# Altium PCB AP1220_MachXO2_DB.PcbDoc (part 2 of 2)
Units mil, origin at the board's own origin, x right, y up, seen from the top; angles counter-clockwise.
Board outline 3005 x 3350 mil, 4 copper layers (Top Layer, GND PLANE, POWER PLANE, Bottom Layer); 120 components, 198 nets, 716 pads, 269 vias.
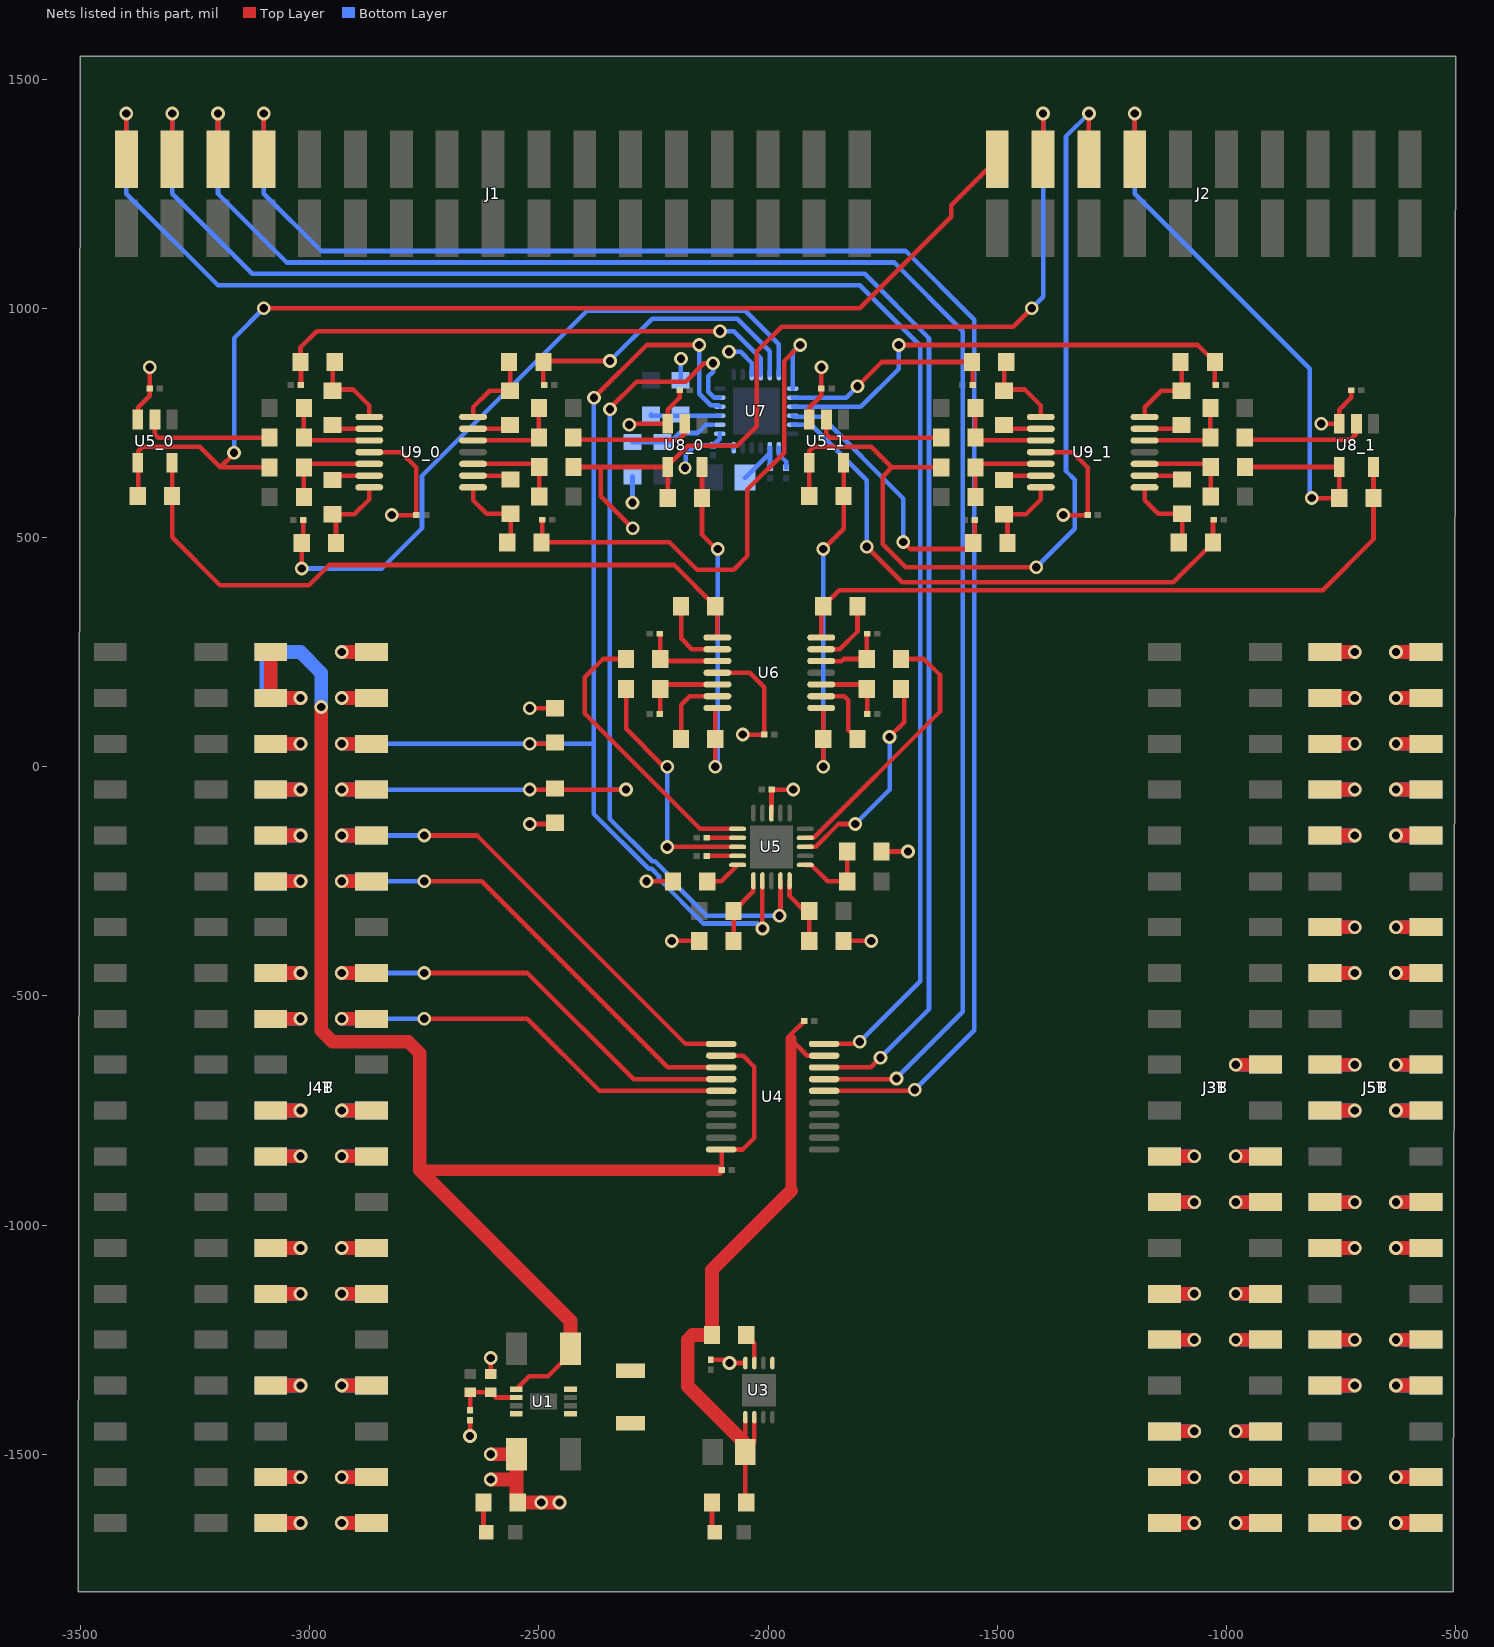
[diagram p4: the nets of this part, all layers, seen from the top]

## Via types
v1: diameter 30, hole 18, Top Layer to Bottom Layer, 251 vias
v2: diameter 25.98, hole 12.99, Top Layer to Bottom Layer, tented top, 11 vias
v3: diameter 30, hole 18, Top Layer to Bottom Layer, tented both sides, 6 vias
v4: diameter 28, hole 18, Top Layer to Bottom Layer, 1 vias

## Nets (pads, with @x,y where several pads share a name; then routed paths per layer and width w, separated by ;. In a path a pad name is that pad's centre, name@x,y a point inside that pad or via, vN(x,y) a via of type N, cw(c..) or ccw(c..) an arc to the next point about the centre after c; other vN are vias at no path point) (continued)
J3-20: J3B.20 J3T.20 | length 130
  Top Layer w30: v1(-980,-650) J3T.20@-915,-650
  Bottom Layer w30: v1(-980,-650) J3B.20@-915,-650
J3-23: J3B.23 J3T.23 | length 130
  Top Layer w30: J3T.23@-1135,-850 v1(-1070,-850)
  Bottom Layer w30: J3B.23@-1135,-850 v1(-1070,-850)
J3-24: J3B.24 J3T.24 | length 130
  Top Layer w30: v1(-980,-850) J3T.24@-915,-850
  Bottom Layer w30: v1(-980,-850) J3B.24@-915,-850
J3-25: J3B.25 J3T.25 | length 130
  Top Layer w30: J3T.25@-1135,-950 v1(-1070,-950)
  Bottom Layer w30: J3B.25@-1135,-950 v1(-1070,-950)
J3-26: J3B.26 J3T.26 | length 130
  Top Layer w30: v1(-980,-950) J3T.26@-915,-950
  Bottom Layer w30: v1(-980,-950) J3B.26@-915,-950
J3-29: J3B.29 J3T.29 | length 130
  Top Layer w30: J3T.29@-1135,-1150 v1(-1070,-1150)
  Bottom Layer w30: J3B.29@-1135,-1150 v1(-1070,-1150)
J3-30: J3B.30 J3T.30 | length 130
  Top Layer w30: v1(-980,-1150) J3T.30@-915,-1150
  Bottom Layer w30: v1(-980,-1150) J3B.30@-915,-1150
J3-31: J3B.31 J3T.31 | length 130
  Top Layer w30: J3T.31@-1135,-1250 v1(-1070,-1250)
  Bottom Layer w30: J3B.31@-1135,-1250 v1(-1070,-1250)
J3-32: J3B.32 J3T.32 | length 130
  Top Layer w30: v1(-980,-1250) J3T.32@-915,-1250
  Bottom Layer w30: v1(-980,-1250) J3B.32@-915,-1250
J3-35: J3B.35 J3T.35 | length 130
  Top Layer w30: J3T.35@-1135,-1450 v1(-1070,-1450)
  Bottom Layer w30: J3B.35@-1135,-1450 v1(-1070,-1450)
J3-36: J3B.36 J3T.36 | length 130
  Top Layer w30: v1(-980,-1450) J3T.36@-915,-1450
  Bottom Layer w30: v1(-980,-1450) J3B.36@-915,-1450
J3-37: J3B.37 J3T.37 | length 130
  Top Layer w30: J3T.37@-1135,-1550 v1(-1070,-1550)
  Bottom Layer w30: J3B.37@-1135,-1550 v1(-1070,-1550)
J3-38: J3B.38 J3T.38 | length 130
  Top Layer w30: v1(-980,-1550) J3T.38@-915,-1550
  Bottom Layer w30: v1(-980,-1550) J3B.38@-915,-1550
J3-39: J3B.39 J3T.39 | length 130
  Top Layer w30: J3T.39@-1135,-1650 v1(-1070,-1650)
  Bottom Layer w30: J3B.39@-1135,-1650 v1(-1070,-1650)
J3-40: J3B.40 J3T.40 | length 130
  Top Layer w30: v1(-980,-1650) J3T.40@-915,-1650
  Bottom Layer w30: v1(-980,-1650) J3B.40@-915,-1650
J4-2: J4B.2 J4T.2 | length 130
  Top Layer w30: v1(-2930,250) J4T.2@-2865,250
  Bottom Layer w30: v1(-2930,250) J4B.2@-2865,250
J4-4: J4B.4 J4T.4 | length 130
  Top Layer w30: v1(-2930,150) J4T.4@-2865,150
  Bottom Layer w30: v1(-2930,150) J4B.4@-2865,150
J4-5: J4B.5 J4T.5 | length 130
  Top Layer w30: J4T.5@-3085,50 v1(-3020,50)
  Bottom Layer w30: J4B.5@-3085,50 v1(-3020,50)
J4-7: J4B.7 J4T.7 | length 130
  Top Layer w30: J4T.7@-3085,-50 v1(-3020,-50)
  Bottom Layer w30: J4B.7@-3085,-50 v1(-3020,-50)
J4-9: J4B.9 J4T.9 | length 130
  Top Layer w30: J4T.9@-3085,-150 v1(-3020,-150)
  Bottom Layer w30: J4B.9@-3085,-150 v1(-3020,-150)
J4-11: J4B.11 J4T.11 | length 130
  Top Layer w30: J4T.11@-3085,-250 v1(-3020,-250)
  Bottom Layer w30: J4B.11@-3085,-250 v1(-3020,-250)
J4-15: J4B.15 J4T.15 | length 130
  Top Layer w30: J4T.15@-3085,-450 v1(-3020,-450)
  Bottom Layer w30: J4B.15@-3085,-450 v1(-3020,-450)
J4-17: J4B.17 J4T.17 | length 130
  Top Layer w30: J4T.17@-3085,-550 v1(-3020,-550)
  Bottom Layer w30: J4B.17@-3085,-550 v1(-3020,-550)
J4-21: J4B.21 J4T.21 | length 130
  Top Layer w30: J4T.21@-3085,-750 v1(-3020,-750)
  Bottom Layer w30: J4B.21@-3085,-750 v1(-3020,-750)
J4-22: J4B.22 J4T.22 | length 130
  Top Layer w30: v1(-2930,-750) J4T.22@-2865,-750
  Bottom Layer w30: v1(-2930,-750) J4B.22@-2865,-750
J4-23: J4B.23 J4T.23 | length 130
  Top Layer w30: J4T.23@-3085,-850 v1(-3020,-850)
  Bottom Layer w30: J4B.23@-3085,-850 v1(-3020,-850)
J4-24: J4B.24 J4T.24 | length 130
  Top Layer w30: v1(-2930,-850) J4T.24@-2865,-850
  Bottom Layer w30: v1(-2930,-850) J4B.24@-2865,-850
J4-27: J4B.27 J4T.27 | length 130
  Top Layer w30: J4T.27@-3085,-1050 v1(-3020,-1050)
  Bottom Layer w30: J4B.27@-3085,-1050 v1(-3020,-1050)
J4-28: J4B.28 J4T.28 | length 130
  Top Layer w30: v1(-2930,-1050) J4T.28@-2865,-1050
  Bottom Layer w30: v1(-2930,-1050) J4B.28@-2865,-1050
J4-29: J4B.29 J4T.29 | length 130
  Top Layer w30: J4T.29@-3085,-1150 v1(-3020,-1150)
  Bottom Layer w30: J4B.29@-3085,-1150 v1(-3020,-1150)
J4-30: J4B.30 J4T.30 | length 130
  Top Layer w30: v1(-2930,-1150) J4T.30@-2865,-1150
  Bottom Layer w30: v1(-2930,-1150) J4B.30@-2865,-1150
J4-33: J4B.33 J4T.33 | length 130
  Top Layer w30: J4T.33@-3085,-1350 v1(-3020,-1350)
  Bottom Layer w30: J4B.33@-3085,-1350 v1(-3020,-1350)
J4-34: J4B.34 J4T.34 | length 130
  Top Layer w30: v1(-2930,-1350) J4T.34@-2865,-1350
  Bottom Layer w30: v1(-2930,-1350) J4B.34@-2865,-1350
J4-37: J4B.37 J4T.37 | length 130
  Top Layer w30: J4T.37@-3085,-1550 v1(-3020,-1550)
  Bottom Layer w30: J4B.37@-3085,-1550 v1(-3020,-1550)
J4-38: J4B.38 J4T.38 | length 130
  Top Layer w30: v1(-2930,-1550) J4T.38@-2865,-1550
  Bottom Layer w30: v1(-2930,-1550) J4B.38@-2865,-1550
J4-39: J4B.39 J4T.39 | length 130
  Top Layer w30: J4T.39@-3085,-1650 v1(-3020,-1650)
  Bottom Layer w30: J4B.39@-3085,-1650 v1(-3020,-1650)
J4-40: J4B.40 J4T.40 | length 130
  Top Layer w30: v1(-2930,-1650) J4T.40@-2865,-1650
  Bottom Layer w30: v1(-2930,-1650) J4B.40@-2865,-1650
J5-1: J5B.1 J5T.1 | length 130
  Top Layer w30: J5T.1@-785,250 v1(-720,250)
  Bottom Layer w30: J5B.1@-785,250 v1(-720,250)
J5-2: J5B.2 J5T.2 | length 130
  Top Layer w30: v1(-630,250) J5T.2@-565,250
  Bottom Layer w30: v1(-630,250) J5B.2@-565,250
J5-3: J5B.3 J5T.3 | length 130
  Top Layer w30: J5T.3@-785,150 v1(-720,150)
  Bottom Layer w30: J5B.3@-785,150 v1(-720,150)
J5-4: J5B.4 J5T.4 | length 130
  Top Layer w30: v1(-630,150) J5T.4@-565,150
  Bottom Layer w30: v1(-630,150) J5B.4@-565,150
J5-5: J5B.5 J5T.5 | length 130
  Top Layer w30: J5T.5@-785,50 v1(-720,50)
  Bottom Layer w30: J5B.5@-785,50 v1(-720,50)
J5-6: J5B.6 J5T.6 | length 130
  Top Layer w30: v1(-630,50) J5T.6@-565,50
  Bottom Layer w30: v1(-630,50) J5B.6@-565,50
J5-7: J5B.7 J5T.7 | length 130
  Top Layer w30: J5T.7@-785,-50 v1(-720,-50)
  Bottom Layer w30: J5B.7@-785,-50 v1(-720,-50)
J5-8: J5B.8 J5T.8 | length 130
  Top Layer w30: v1(-630,-50) J5T.8@-565,-50
  Bottom Layer w30: v1(-630,-50) J5B.8@-565,-50
J5-9: J5B.9 J5T.9 | length 130
  Top Layer w30: J5T.9@-785,-150 v1(-720,-150)
  Bottom Layer w30: J5B.9@-785,-150 v1(-720,-150)
J5-10: J5B.10 J5T.10 | length 130
  Top Layer w30: v1(-630,-150) J5T.10@-565,-150
  Bottom Layer w30: v1(-630,-150) J5B.10@-565,-150
J5-13: J5B.13 J5T.13 | length 130
  Top Layer w30: J5T.13@-785,-350 v1(-720,-350)
  Bottom Layer w30: J5B.13@-785,-350 v1(-720,-350)
J5-14: J5B.14 J5T.14 | length 130
  Top Layer w30: v1(-630,-350) J5T.14@-565,-350
  Bottom Layer w30: v1(-630,-350) J5B.14@-565,-350
J5-15: J5B.15 J5T.15 | length 130
  Top Layer w30: J5T.15@-785,-450 v1(-720,-450)
  Bottom Layer w30: J5B.15@-785,-450 v1(-720,-450)
J5-16: J5B.16 J5T.16 | length 130
  Top Layer w30: v1(-630,-450) J5T.16@-565,-450
  Bottom Layer w30: v1(-630,-450) J5B.16@-565,-450
J5-19: J5B.19 J5T.19 | length 130
  Top Layer w30: J5T.19@-785,-650 v1(-720,-650)
  Bottom Layer w30: J5B.19@-785,-650 v1(-720,-650)
J5-20: J5B.20 J5T.20 | length 130
  Top Layer w30: v1(-630,-650) J5T.20@-565,-650
  Bottom Layer w30: v1(-630,-650) J5B.20@-565,-650
J5-21: J5B.21 J5T.21 | length 130
  Top Layer w30: J5T.21@-785,-750 v1(-720,-750)
  Bottom Layer w30: J5B.21@-785,-750 v1(-720,-750)
J5-22: J5B.22 J5T.22 | length 130
  Top Layer w30: v1(-630,-750) J5T.22@-565,-750
  Bottom Layer w30: v1(-630,-750) J5B.22@-565,-750
J5-25: J5B.25 J5T.25 | length 130
  Top Layer w30: J5T.25@-785,-950 v1(-720,-950)
  Bottom Layer w30: J5B.25@-785,-950 v1(-720,-950)
J5-26: J5B.26 J5T.26 | length 130
  Top Layer w30: v1(-630,-950) J5T.26@-565,-950
  Bottom Layer w30: v1(-630,-950) J5B.26@-565,-950
J5-27: J5B.27 J5T.27 | length 130
  Top Layer w30: J5T.27@-785,-1050 v1(-720,-1050)
  Bottom Layer w30: J5B.27@-785,-1050 v1(-720,-1050)
J5-28: J5B.28 J5T.28 | length 130
  Top Layer w30: v1(-630,-1050) J5T.28@-565,-1050
  Bottom Layer w30: v1(-630,-1050) J5B.28@-565,-1050
J5-31: J5B.31 J5T.31 | length 130
  Top Layer w30: J5T.31@-785,-1250 v1(-720,-1250)
  Bottom Layer w30: J5B.31@-785,-1250 v1(-720,-1250)
J5-32: J5B.32 J5T.32 | length 130
  Top Layer w30: v1(-630,-1250) J5T.32@-565,-1250
  Bottom Layer w30: v1(-630,-1250) J5B.32@-565,-1250
J5-33: J5B.33 J5T.33 | length 130
  Top Layer w30: J5T.33@-785,-1350 v1(-720,-1350)
  Bottom Layer w30: J5B.33@-785,-1350 v1(-720,-1350)
J5-34: J5B.34 J5T.34 | length 130
  Top Layer w30: v1(-630,-1350) J5T.34@-565,-1350
  Bottom Layer w30: v1(-630,-1350) J5B.34@-565,-1350
J5-37: J5B.37 J5T.37 | length 130
  Top Layer w30: J5T.37@-785,-1550 v1(-720,-1550)
  Bottom Layer w30: J5B.37@-785,-1550 v1(-720,-1550)
J5-38: J5B.38 J5T.38 | length 130
  Top Layer w30: v1(-630,-1550) J5T.38@-565,-1550
  Bottom Layer w30: v1(-630,-1550) J5B.38@-565,-1550
J5-39: J5B.39 J5T.39 | length 130
  Top Layer w30: J5T.39@-785,-1650 v1(-720,-1650)
  Bottom Layer w30: J5B.39@-785,-1650 v1(-720,-1650)
J5-40: J5B.40 J5T.40 | length 130
  Top Layer w30: v1(-630,-1650) J5T.40@-565,-1650
  Bottom Layer w30: v1(-630,-1650) J5B.40@-565,-1650
NetC2_1: C2.1 R2.1 R3.2 U1.6 | length 145
  Top Layer w10: C2.1@-2650,-1403.98 R3.2@-2650,-1364.69 R2.1@-2605,-1364.68 -2593.54,-1376.14 U1.6@-2549.06,-1376.14
NetC12_1: C12.1 R16.2 U6.3 | length 179.9
  Top Layer w10: C12.1@-2235,288.62 R16.2@-2235,235 -2230.59,230.59 U6.3@-2110.59,230.59
NetC13_2: C13.2 R15.2 U6.12 | length 157.3
  Top Layer w10: U6.12@-1884.21,230.59 -1883.62,230 -1840,230 -1835,235 R15.2@-1784.8,235 -1784.8,288.62 C13.2@-1783.43,290
NetC14_2: C14.2 R20.2 U6.5 | length 183.9
  Top Layer w10: C14.2@-2236.38,115 -2235,116.38 R20.2@-2235,170 -2225.59,179.41 U6.5@-2110.59,179.41
NetC15_1: C15.1 R21.2 U6.10 | length 156.9
  Top Layer w10: U6.10@-1884.21,179.41 -1794.21,179.41 R21.2@-1784.8,170 ; C15.1@-1783.43,115 R21.2@-1783.43,168.62
NetC16_2: C16.2 U5.4 | length 67.7
  Top Layer w10: C16.2@-2133.98,-195 -2133.66,-194.68 U5.4@-2066.42,-194.68
NetC17_2: C17.2 U5.2 | length 67.7
  Top Layer w10: C17.2@-2133.98,-155 -2133.66,-155.32 U5.2@-2066.42,-155.32
NetC19_2: C19.2 C20.2 U7.8 | length 132
  Bottom Layer w10: C20.2@-2050.35,630.74 -2049.42,630.74 -1996.26,683.9 U7.8@-1996.26,696.02 ; C19.2@-1995.79,651.76 U7.8@-1995.79,695.54
NetC21_2: C21.2 U7.7 | length 50.8
  Bottom Layer w10: U7.7@-1976.57,696.02 -1976.57,681.53 -1960.79,665.74 C21.2@-1960.79,651.76
NetC23_0_2: C23_0.2 R54_0.2 U7.22 | length 1161
  Top Layer w10: C23_0.2@-3018.94,832.95 -3018.94,881.89 R54_0.2@-3020,882.95 -3020,915 -2985,950 v1(-2105,950)
  Bottom Layer w10: v1(-2105,950) -2075,950 -2015.94,890.94 U7.22@-2015.94,855.46
NetC23_1_2: C23_1.2 R54_1.2 U7.2 | length 473.7
  Top Layer w10: v1(-1805,830) -1752.05,882.95 R54_1.2@-1555,882.95 -1553.94,881.89 C23_1.2@-1553.94,832.95
  Bottom Layer w10: U7.2@-1946.06,805.27 -1829.73,805.27 v1(-1805,830)
NetC24_0_2: C24_0.2 R55_0.2 U7.23 | length 661.5
  Top Layer w10: C24_0.2@-2490.2,834.49 R55_0.2@-2490.2,882.95 -2488.15,885 v1(-2345,885)
  Bottom Layer w10: v1(-2345,885) -2253,977 -2067,977 -1996.26,906.26 U7.23@-1996.26,855.46
NetC24_1_2: C24_1.2 R55_1.2 U7.3 | length 1070.7
  Top Layer w10: v1(-1715,920) -1062.24,920 R55_1.2@-1025.2,882.95 C24_1.2@-1025.2,834.49
  Bottom Layer w10: U7.3@-1945.48,785 -1797.67,785 -1715,867.67 v1(-1715,920)
NetC25_0_2: C25_0.2 R59_0.2 U7.24 | length 1544.7
  Top Layer w10: v1(-3017.4,432.4) R59_0.2@-3017.4,487.95 -3013.94,491.42 C25_0.2@-3013.94,537.95
  Bottom Layer w10: v1(-3017.4,432.4) -2842.6,432.4 -2755,520 -2755,635 -2395,995 -2050,995 -1976.57,921.57 U7.24@-1976.57,855.46
NetC25_1_2: C25_1.2 R59_1.2 U7.4 | length 626.6
  Top Layer w10: v1(-1705,490) -1690,475 -1565.35,475 R59_1.2@-1552.4,487.95 -1548.94,491.42 C25_1.2@-1548.94,537.95
  Bottom Layer w10: U7.4@-1946.06,765.9 -1943.38,763.21 -1883.21,763.21 -1705,585 v1(-1705,490)
NetC26_0_2: C26_0.2 R60_0.2 U7.1 | length 1143.4
  Top Layer w10: C26_0.2@-2492.84,538.98 -2492.84,490 -2215,490 -2155,430 -2075,430 -2045,460 -2045,605 -1965,685 -1965,885 v1(-1930,920)
  Bottom Layer w10: U7.1@-1946.06,824.95 -1946.06,903.94 v1(-1930,920)
NetC26_1_2: C26_1.2 R60_1.2 U7.5 | length 1230.8
  Top Layer w10: v1(-1785,480) -1707,402 -1116.39,402 R60_1.2@-1029.41,488.98 -1029.41,537.4 C26_1.2@-1027.84,538.98
  Bottom Layer w10: U7.5@-1946.06,746.21 -1906.21,746.21 -1785,625 v1(-1785,480)
NetJ1_2: J1.2 U4.20 | length 3797
  Top Layer w10: J1.2@-3400,1325 v1(-3400,1425) ; U4.20@-1877.8,-604.84 -1804.84,-604.84 v1(-1800,-600)
  Bottom Layer w10: v1(-3400,1425) -3400,1250 -3200,1050 -1800,1050 -1668,918 -1668,-468 v1(-1800,-600)
NetJ1_4: J1.4 U4.18 | length 3801.9
  Top Layer w10: J1.4@-3300,1325 v1(-3300,1425) ; U4.18@-1877.8,-656.02 -1776.02,-656.02 v1(-1755,-635)
  Bottom Layer w10: v1(-3300,1425) -3300,1250 -3125,1075 -1789,1075 -1649,935 -1649,-529 v1(-1755,-635)
NetJ1_6: J1.6 U4.17 | length 3872.8
  Top Layer w10: J1.6@-3200,1325 v1(-3200,1425) ; U4.17@-1877.8,-681.61 -1721.61,-681.61 v1(-1720,-680)
  Bottom Layer w10: v1(-3200,1425) -3200,1250 -3050,1100 -1725,1100 -1575,950 -1575,-535 v1(-1720,-680)
NetJ1_8: J1.8 U4.16 | length 3871.5
  Top Layer w10: J1.8@-3100,1325 v1(-3100,1425) ; U4.16@-1877.8,-707.2 -1682.2,-707.2 v1(-1680,-705)
  Bottom Layer w10: v1(-3100,1425) -3100,1250 -2975,1125 -1700,1125 -1550,975 -1550,-575 v1(-1680,-705)
NetJ4B_6: J4B.6 J4T.6 R10.2 U5.7 U7.16 | length 2594.3
  Top Layer w10: v1(-2520,50) R10.2@-2467.6,50 ; v1(-2380,805) -2265,920 v1(-2150,920) ; v1(-2012.28,-352.72) U5.7@-2012.28,-248.82
  Top Layer w30: v1(-2930,50) J4T.6@-2865,50
  Bottom Layer w10: J4B.6@-2865,50 v1(-2520,50) -2380,50 ; v1(-2380,805) -2380,50 ; v1(-2150,920) -2150,813.6 -2124.67,788.27 -2108.2,788.27 U7.16@-2105.51,785.58 ; v1(-2012.28,-352.72) -2023,-342 -2141.08,-342 -2238,-245.08 -2238,-238.82 -2253.82,-223 -2260.08,-223 -2380,-103.08 -2380,50
  Bottom Layer w30: v1(-2930,50) J4B.6@-2865,50
NetJ4B_8: J4B.8 J4T.8 R11.2 U5.9 U7.17 | length 2506.1
  Top Layer w10: v1@-2510,-50 v1(-2310,-50) ; v1(-2345,780) -2345,782 -2287,840 -2180,840 -2140,880 v1(-2120,880) ; v1(-1975,-325) -1972.91,-322.91 U5.9@-1972.91,-248.82
  Top Layer w30: v1(-2930,-50) J4T.8@-2865,-50
  Bottom Layer w10: J4B.8@-2865,-50 v1(-2520,-50) ; v1(-2345,780) -2345,-50 ; v1(-2310,-50) -2345,-50 ; v1(-2120,880) -2120,861.87 -2130.31,851.57 -2130.31,817.94 -2117.63,805.27 U7.17@-2105.51,805.27 ; v1(-1975,-325) -2134.04,-325 -2221,-238.04 -2221,-231.77 -2246.77,-206 -2253.04,-206 -2345,-114.04 -2345,-50
  Bottom Layer w30: v1(-2930,-50) J4B.8@-2865,-50
NetJ4B_10: J4B.10 J4T.10 U4.1 | length 1081.2
  Top Layer w10: v1(-2750,-150) -2635,-150 -2180.16,-604.84 U4.1@-2102.2,-604.84
  Top Layer w30: v1(-2930,-150) J4T.10@-2865,-150
  Bottom Layer w10: J4B.10@-2865,-150 v1(-2750,-150)
  Bottom Layer w30: v1(-2930,-150) J4B.10@-2865,-150
NetJ4B_12: J4B.12 J4T.12 U4.3 | length 1061
  Top Layer w10: v1(-2750,-250) -2625,-250 -2218.98,-656.02 U4.3@-2102.2,-656.02
  Top Layer w30: v1(-2930,-250) J4T.12@-2865,-250
  Bottom Layer w10: J4B.12@-2865,-250 v1(-2750,-250)
  Bottom Layer w30: v1(-2930,-250) J4B.12@-2865,-250
NetJ4B_16: J4B.16 J4T.16 U4.4 | length 988.7
  Top Layer w10: v1(-2750,-450) -2525,-450 -2293.39,-681.61 U4.4@-2102.2,-681.61
  Top Layer w30: v1(-2930,-450) J4T.16@-2865,-450
  Bottom Layer w10: J4B.16@-2865,-450 v1(-2750,-450)
  Bottom Layer w30: v1(-2930,-450) J4B.16@-2865,-450
NetJ4B_18: J4B.18 J4T.18 U4.5 | length 957.9
  Top Layer w10: v1(-2750,-550) -2525,-550 -2367.8,-707.2 U4.5@-2102.2,-707.2
  Top Layer w30: v1(-2930,-550) J4T.18@-2865,-550
  Bottom Layer w10: J4B.18@-2865,-550 v1(-2750,-550)
  Bottom Layer w30: v1(-2930,-550) J4B.18@-2865,-550
NetL1_2: L1.2 U1.1
NetLED1_2: LED1.2 R1.1 | length 67.4
  Top Layer w10: R1.1@-2620.91,-1605 -2620.91,-1664.09 LED1.2@-2615,-1670
NetLED3_2: LED3.2 R8.1 | length 67.4
  Top Layer w10: R8.1@-2122.4,-1605 -2122.4,-1664.09 LED3.2@-2116.5,-1670
NetR12_1: R12.1 U5.5 | length 80.9
  Top Layer w10: R12.1@-2132.6,-250 -2102.05,-250 U5.5@-2066.42,-214.37
NetR13_1: R13.1 U6.2 | length 159.2
  Top Layer w10: R13.1@-2189.8,350 -2189.8,279.8 -2166.18,256.18 U6.2@-2110.59,256.18
NetR13_2: R13.2 R18_0.2 U5_0.5 U6.1 | length 1517.2
  Top Layer w10: U5_0.5@-3300.24,662.95 R18_0.2@-3300.24,590.2 -3300.24,500.24 -3195.4,395.4 -3002.08,395.4 -2957.48,440 -2205,440 R13.2@-2115,350 -2110.59,345.59 U6.1@-2110.59,281.77
NetR14_1: R14.1 R20_1.2 U6.14 U8_1.5 | length 1489
  Top Layer w10: U6.14@-1884.21,281.77 -1884.21,345.59 R14.1@-1879.8,350 -1844.8,385 -790,385 -679.21,495.79 R20_1.2@-679.21,586.02 U8_1.5@-679.21,653.78
NetR14_2: R14.2 U6.13 | length 150.3
  Top Layer w10: U6.13@-1884.21,256.18 -1843.82,256.18 -1805,295 R14.2@-1805,350
NetR17_2: R17.2 R24.1 U5.11 | length 171.1
  Top Layer w10: U5.11@-1918.78,-214.37 -1905.63,-214.37 -1870,-250 R24.1@-1827.4,-250 R17.2@-1827.4,-185
NetR18_1_2: R18_1.2 R23.2 U5_1.5 U6.8 | length 811.9
  Top Layer w10: U6.8@-1884.21,128.23 -1879.8,123.82 R23.2@-1879.8,60 v1(-1879.8,-0.2) ; v1(-1879.8,474.8) -1835.24,519.37 U5_1.5@-1835.24,662.95
  Bottom Layer w10: v1(-1879.8,-0.2) v1(-1879.8,474.8)
NetR18_2: R18.2 R25.1 U5.10 | length 154.9
  Top Layer w10: U5.10@-1953.23,-248.82 -1953.23,-281.77 -1920,-315 R25.1@-1910,-315 R18.2@-1910,-380
NetR19_2: R19.2 R26.1 U5.6 | length 149.1
  Top Layer w10: R19.2@-2075.2,-380 R26.1@-2075.2,-315 -2031.97,-271.77 U5.6@-2031.97,-248.82
NetR20_0_2: R20_0.2 R22.1 U6.7 U8_0.5 | length 795
  Top Layer w10: U8_0.5@-2144.21,653.78 R20_0.2@-2144.21,586.02 -2144.21,505.79 -2113.43,475 v1(-2110,475) ; v1(-2115,0) R22.1@-2115,60 -2115,123.82 U6.7@-2110.59,128.23
  Bottom Layer w10: v1@-2110,5 v1(-2110,475)
NetR22_2: R22.2 U6.6 | length 162.1
  Top Layer w10: R22.2@-2189.8,60 -2189.8,135.2 -2171.18,153.82 U6.6@-2110.59,153.82
NetR23_0_1: R23_0.1 U9_0.2 | length 83.4
  Top Layer w10: R23_0.1@-2950,745.55 -2941.81,737.36 U9_0.2@-2870,737.36
NetR23_0_2: R23_0.2 R54_0.1 U9_0.1 | length 181.5
  Top Layer w10: R23_0.2@-2950,820.35 -2950,878.15 R54_0.1@-2945.2,882.95 ; R23_0.2@-2947.4,822.95 -2905,822.95 -2870,787.95 U9_0.1@-2870,762.95
NetR23_1: R23.1 U6.9 | length 156.1
  Top Layer w10: U6.9@-1884.21,153.82 -1833.82,153.82 -1825,145 -1825,80 R23.1@-1805,60
NetR23_1_1: R23_1.1 U9_1.2 | length 83.4
  Top Layer w10: R23_1.1@-1485,745.55 -1476.81,737.36 U9_1.2@-1405,737.36
NetR23_1_2: R23_1.2 R54_1.1 U9_1.1 | length 181.5
  Top Layer w10: R23_1.2@-1485,820.35 -1485,878.15 R54_1.1@-1480.2,882.95 ; R23_1.2@-1482.4,822.95 -1440,822.95 -1405,787.95 U9_1.1@-1405,762.95
NetR24_0_1: R24_0.1 U9_0.13 | length 84.4
  Top Layer w10: U9_0.13@-2643.62,737.36 -2570.79,737.36 R24_0.1@-2562.6,745.55
NetR24_0_2: R24_0.2 R55_0.1 U9_0.14 | length 180.9
  Top Layer w10: U9_0.14@-2643.62,762.95 -2643.62,784.33 -2607.6,820.35 R24_0.2@-2562.6,820.35 -2562.6,880.55 R55_0.1@-2565,882.95
NetR24_1_1: R24_1.1 U9_1.13 | length 84.4
  Top Layer w10: U9_1.13@-1178.62,737.36 -1105.79,737.36 R24_1.1@-1097.6,745.55
NetR24_1_2: R24_1.2 R55_1.1 U9_1.14 | length 180.9
  Top Layer w10: U9_1.14@-1178.62,762.95 -1178.62,784.33 -1142.6,820.35 R24_1.2@-1097.6,820.35 -1097.6,880.55 R55_1.1@-1100,882.95
NetR27_0_1: R27_0.1 R33_0.2 U9_0.3 | length 210.2
  Top Layer w10: R27_0.1@-3012.6,782.95 R33_0.2@-3012.6,717.95 -3006.42,711.77 U9_0.3@-2870,711.77
NetR27_1_1: R27_1.1 R33_1.2 U9_1.3 | length 210.2
  Top Layer w10: R27_1.1@-1547.6,782.95 R33_1.2@-1547.6,717.95 -1541.42,711.77 U9_1.3@-1405,711.77
NetR27_2: R27.2 R29.1 U7.14 | length 191.2
  Bottom Layer w10: R27.2@-2295.79,708.19 -2230.79,708.19 -2213.39,708.19 -2193.55,728.02 -2153.55,728.02 -2135.32,746.26 -2120.32,746.26
NetR28_2: R28.2 R30.1 U7.15 | length 151.3
  Bottom Layer w10: R30.1@-2255.79,765.39 R30.1@-2254.84,765.39 ; R30.1@-2254.84,768.39 -2252.4,765.94 U7.15@-2105.51,765.9
NetR31_0_2: R31_0.2 R58_0.2 U9_0.12 | length 211.2
  Top Layer w10: U9_0.12@-2643.62,711.77 -2506.18,711.77 R31_0.2@-2500,717.95 R58_0.2@-2500,782.95
NetR31_1_2: R31_1.2 R58_1.2 U9_1.12 | length 211.2
  Top Layer w10: U9_1.12@-1178.62,711.77 -1041.18,711.77 R31_1.2@-1035,717.95 R58_1.2@-1035,782.95
NetR35_0_2: R35_0.2 R39_0.2 U9_0.5 | length 210.8
  Top Layer w10: R39_0.2@-3012.6,587.95 R35_0.2@-3012.6,652.95 -3004.96,660.59 U9_0.5@-2870,660.59
NetR35_1_2: R35_1.2 R39_1.2 U9_1.5 | length 210.8
  Top Layer w10: R39_1.2@-1547.6,587.95 R35_1.2@-1547.6,652.95 -1539.96,660.59 U9_1.5@-1405,660.59
NetR36_0_2: R36_0.2 R40_0.1 U9_0.10 | length 212.1
  Top Layer w10: U9_0.10@-2643.62,660.59 -2505.83,660.59 R36_0.2@-2499.21,653.98 R40_0.1@-2499.21,588.98
NetR36_1_2: R36_1.2 R40_1.1 U9_1.10 | length 212.1
  Top Layer w10: U9_1.10@-1178.62,660.59 -1040.83,660.59 R36_1.2@-1034.21,653.98 R40_1.1@-1034.21,588.98
NetR43_0_1: R43_0.1 R59_0.1 U9_0.7 | length 167.7
  Top Layer w10: R59_0.1@-2942.6,487.95 R43_0.1@-2942.6,543.15 ; R43_0.1@-2942.6,550.55 -2902.4,550.55 -2870,582.95 U9_0.7@-2870,609.41
NetR43_0_2: R43_0.2 U9_0.6 | length 84
  Top Layer w10: R43_0.2@-2950,625.35 -2940.35,635 U9_0.6@-2870,635
NetR43_1_1: R43_1.1 R59_1.1 U9_1.7 | length 167.7
  Top Layer w10: R59_1.1@-1477.6,487.95 R43_1.1@-1477.6,543.15 ; R43_1.1@-1477.6,550.55 -1437.4,550.55 -1405,582.95 U9_1.7@-1405,609.41
NetR43_1_2: R43_1.2 U9_1.6 | length 84
  Top Layer w10: R43_1.2@-1485,625.35 -1475.35,635 U9_1.6@-1405,635
NetR44_0_1: R44_0.1 R60_0.1 U9_0.8 | length 187.7
  Top Layer w10: U9_0.8@-2643.62,609.41 -2643.62,581.57 -2613.62,551.57 R44_0.1@-2561.81,551.57 -2561.81,496.38 R60_0.1@-2569.21,488.98
NetR44_0_2: R44_0.2 U9_0.9 | length 85.4
  Top Layer w10: U9_0.9@-2643.62,635 -2570.43,635 R44_0.2@-2561.81,626.38
NetR44_1_1: R44_1.1 R60_1.1 U9_1.8 | length 187.7
  Top Layer w10: U9_1.8@-1178.62,609.41 -1178.62,581.57 -1148.62,551.57 R44_1.1@-1096.81,551.57 -1096.81,496.38 R60_1.1@-1104.21,488.98
NetR44_1_2: R44_1.2 U9_1.9 | length 85.4
  Top Layer w10: U9_1.9@-1178.62,635 -1105.43,635 R44_1.2@-1096.81,626.38
NetU3_5: U3.5
PG_V3P6: R9.1 U3.7 | length 68.3
  Top Layer w10: R9.1@-2047.6,-1240 -2029.84,-1257.76 U3.7@-2029.84,-1300.94
V2P5: C7.2 C9.2 R8.2 R9.2 U3.1 U3.2 U4.19 | length 1477
  Top Layer w10: R8.2@-2049.57,-1603.03 C7.2@-2049.57,-1495 ; U3.1@-2049.53,-1419.06 -2049.53,-1494.96 -2029.84,-1475.28 U3.2@-2029.84,-1419.06 ; C9.2@-1921.02,-555 -1950,-583.98 -1950,-595 -1914.57,-630.43 U4.19@-1877.8,-630.43
  Top Layer w25: -1950,-925 -1950,-595
  Top Layer w30: C7.2@-2049.57,-1495 -2049.57,-1477.76 -2175,-1352.33 -2175,-1250 -2165,-1240 R9.2@-2122.4,-1240 -2122.4,-1097.4 -1950,-925
V3P3: C1.2 C8.2 J4B.1 J4B.3 J4T.1 J4T.3 L1.1 U1.4 U1.5 U4.2 U4.10 | length 3432.4
  Top Layer w10: U1.5@-2549.06,-1358.43 -2520.63,-1330 -2480,-1330 -2430.94,-1280.94 C1.2@-2430.94,-1270 ; U4.10@-2102.2,-835.16 -2055.16,-835.16 -2030,-810 -2030,-655 -2054.57,-630.43 U4.2@-2102.2,-630.43 ; C8.2@-2101.02,-880 U4.10@-2101.02,-836.34
  Top Layer w25: -2760,-880 C8.2@-2108.06,-880
  Top Layer w30: J4T.1@-3085,250 J4T.3@-3085,150 v1(-3020,150) ; v1(-2975,130) -2975,-575 -2950,-600 -2785,-600 -2760,-625 -2760,-880 -2430.94,-1209.06 C1.2@-2430.94,-1270
  Bottom Layer w30: J4B.3@-3095,150 J4B.1@-3095,250 ; J4B.3@-3085,150 v1(-3020,150) ; J4B.1@-3085,250 -3020,250 -2975,205 v1(-2975,130)
V5P0: C2.2 C3.2 C6.2 C10.2 C11.2 C18.2 C18_0.2 C18_1.2 C19_0.2 C19_1.2 C22_0.2 C22_1.2 R1.2 R2.2 R10.1 R11.1 R12.2 R17.1 R18.1 R19.1 R27.1 R28.1 U1.8 U3.8 U5.18 U5_0.3 U5_1.3 U6.4 U7.12 U7.13 U7.21 U8_0.3 U8_1.3 U9_0.4 U9_1.4 | length 2617.7
  Top Layer w10: -3375.04,782.91 -3348.66,809.29 C18_0.2@-3348.66,825 v1(-3348.66,871.34) ; U5_0.3@-3373.61,757.44 -3373.61,782.91 ; U9_0.4@-2870,686.18 -2801.18,686.18 -2767.64,652.64 C22_0.2@-2767.64,548.98 v1(-2821.02,548.98) ; v1(-2650,-1460) C2.2@-2650,-1426.02 ; R2.2@-2605,-1325.31 v1(-2605,-1290) ; v1(-2520,-125) -2467.6,-125 R11.1@-2465,-122.4 ; v1(-2520,127.4) R10.1@-2465,127.4 ; v1(-2455,-1605) v1@-2450,-1600 ; v1@-2298.27,748.27 U8_0.3@-2219.02,748.27 -2219.02,778.94 -2192.64,805.31 C19_0.2@-2192.64,821.02 ; v1(-2265,-250) R12.2@-2207.4,-250 ; v1(-2210,-380) R19.1@-2150,-380 ; C6.2@-2125,-1293.98 -2091.02,-1293.98 v1(-2084.06,-1300.94) U3.8@-2049.53,-1300.94 ; U6.4@-2110.59,205 -2040,205 -2008.43,173.43 C10.2@-2008.43,70 v1(-2055,70) ; U5.18@-1992.6,-101.18 -1992.6,-51.02 C11.2@-1991.57,-50 v1(-1945,-50) ; U5_1.3@-1910.04,757.44 -1910.04,782.91 -1883.66,809.29 C18_1.2@-1883.66,825 v1(-1883.66,871.34) ; R18.1@-1835.2,-380 v1(-1775,-380) ; R17.1@-1752.6,-185 v1(-1695,-185) ; U9_1.4@-1405,686.18 -1336.18,686.18 -1302.64,652.64 C22_1.2@-1302.64,548.98 v1(-1356.02,548.98) ; v1(-793.27,748.27) U8_1.3@-754.02,748.27 -754.02,778.94 -727.64,805.31 C19_1.2@-727.64,821.02
  Top Layer w30: v1(-2605,-1555) -2549.06,-1555 ; v1(-2605,-1500) C3.2@-2549.06,-1500 -2549.06,-1555 ; R1.2@-2549.06,-1602.05 -2549.06,-1555 ; R1.2@-2546.1,-1605 v1(-2495,-1605) v1(-2455,-1605)
  Bottom Layer w10: v1(-2295.79,575.79) R27.1@-2295.79,633.34 ; R28.1@-2190.79,843.14 -2190.79,889.21 v1(-2190,890) ; v4(-2181,652) -2179,654 -2180,655 -2180,680 -2158.98,701.02 C18.2@-2120,701.02 ; U7.13@-2105.51,726.53 -2105.51,715.51 C18.2@-2120,701.02 ; v1(-2085,905) -2060,905 -2035.63,880.63 U7.21@-2035.63,855.46 ; U7.12@-2075,696.02 -2080.01,701.02 C18.2@-2120,701.02
  other v1: -2303,746
VOUTA_0: J2.2 R18_0.1 R35_0.1 U5_0.4 | length 2543.8
  Top Layer w10: R18_0.1@-3373.61,590.2 -3373.61,687.91 -3363.57,697.95 ; -3365,697.95 -3240,697.95 -3195,652.95 ; v1(-3165,685) -3165,682.95 -3195,652.95 ; v1(-3100,1000) -1800,1000 -1600,1200 -1600,1225 J2.2@-1500,1325 ; R35_0.1@-3087.4,652.95 -3195,652.95
  Bottom Layer w10: v1(-3165,685) -3165,935 v1(-3100,1000)
VOUTA_1: J2.6 R18_1.1 R35_1.1 U5_1.4 | length 2093.5
  Top Layer w10: R18_1.1@-1910.04,590.2 U5_1.4@-1910.04,662.95 -1910.04,687.91 -1900,697.95 -1775,697.95 -1730,652.95 ; R35_1.1@-1622.4,652.95 -1730,652.95 ; v1(-1415,435) -1700,435 -1750,485 -1750,632.95 -1730,652.95 ; J2.6@-1300,1325 v1(-1300,1425)
  Bottom Layer w10: v1(-1415,435) -1331.02,518.98 -1331.02,626.02 -1350,645 -1350,1375 v1(-1300,1425)
VOUTA_DAC: R16.1 U5.1 | length 623.6
  Top Layer w10: R16.1@-2309.8,235 -2360,235 -2400,195 -2400,115.96 -2148.41,-135.63 U5.1@-2066.42,-135.63
VOUTA_SENSE_0: R33_0.1 U5_0.2 | length 285.3
  Top Layer w10: U5_0.2@-3337.64,757.44 -3337.64,725.59 -3330,717.95 R33_0.1@-3087.4,717.95
VOUTA_SENSE_1: R33_1.1 U5_1.2 | length 285.3
  Top Layer w10: U5_1.2@-1872.64,757.44 -1872.64,725.59 -1865,717.95 R33_1.1@-1622.4,717.95
VOUTB_0: J2.4 R20_0.1 R36_0.1 U8_0.4 | length 2005.4
  Top Layer w10: R36_0.1@-2424.21,653.78 -2365,653.78 ; v1(-2295,520) -2365,590 -2365,653.78 ; R20_0.1@-2219.02,586.02 U8_0.4@-2219.02,653.78 ; v1(-1425,1000) -1465,960 -1970,960 -2025.16,904.84 -2025.16,742.59 -2025,742.44 -2067.44,700 -2175.36,700 -2219.02,656.34 U8_0.4@-2219.02,653.78 ; J2.4@-1400,1325 v1(-1400,1425) ; -2365,653.78 U8_0.4@-2219.02,653.78
  Bottom Layer w10: v1(-1425,1000) -1400,1025 v1(-1400,1425)
VOUTB_1: J2.8 R20_1.1 R36_1.1 U8_1.4 | length 1433.2
  Top Layer w10: J2.8@-1200,1325 v1(-1200,1425) ; R36_1.1@-959.21,653.78 U8_1.4@-754.02,653.78 R20_1.1@-754.02,586.02 v1(-813.98,586.02) v1@-815,585
  Bottom Layer w10: v1(-1200,1425) -1200,1250 -818.27,868.27 -818.27,590.31 v1(-813.98,586.02)
VOUTB_DAC: R20.1 U5.3 | length 540.1
  Top Layer w10: R20.1@-2309.8,170 -2309.8,82.48 -2227.33,0 v1(-2220,0) ; v1(-2220,-175) U5.3@-2066.42,-175
  Bottom Layer w10: v1(-2220,-175) v1(-2220,0)
VOUTB_SENSE_0: R31_0.1 U8_0.2 | length 266.4
  Top Layer w10: R31_0.1@-2420.86,713.61 -2194.34,713.61 -2181.61,726.34 U8_0.2@-2181.61,748.27
VOUTB_SENSE_1: R31_1.1 U8_1.2 | length 266.4
  Top Layer w10: R31_1.1@-955.86,713.61 -729.34,713.61 -716.61,726.34 U8_1.2@-716.61,748.27
VOUTC_DAC: R21.1 U5.13 | length 471.7
  Top Layer w10: U5.13@-1918.78,-175 -1896.4,-175 -1846.4,-125 v1(-1810,-125) ; v1(-1735,65) -1703,97 -1703,163 R21.1@-1710,170
  Bottom Layer w10: v1(-1810,-125) -1735,-50 v1(-1735,65)
VOUTD_DAC: R15.1 U5.14 | length 587.1
  Top Layer w10: U5.14@-1918.78,-155.32 -1900.76,-155.32 -1625,120.44 -1625,200 -1660,235 R15.1@-1710,235
pads on no net: J1.9 J1.10 J1.11 J1.12 J1.13 J1.14 J1.15 J1.16 J1.17 J1.18 J1.19 J1.20 J1.21 J1.22 J1.23 J1.24 J1.25 J1.26 J1.27 J1.28 J1.29 J1.30 J1.31 J1.32 J1.33 J1.34 J2.9 J2.10 J2.11 J2.12 J2.13 J2.14 J2.15 J2.16 J2.17 J2.18 J2.19 J2.20 U3.4 U4.6 U4.7 U4.8 U4.9 U4.12 U4.13 U4.14 U4.15 U5.8 U5.15 U5.16 U5.17

## Polygon pours and split planes (outlines as drawn)
NetL1_2 on Top Layer "Top Layer-No Net" (solid, pour order 2): -2209.83,-1410 -2208.83,-1411 -2208.83,-1469 -2389.83,-1469 -2390,-1448 -2445,-1448 -2444.83,-1406 -2389.83,-1406 -2389.83,-1410
V3P3 on Top Layer "Top Layer-No Net" (solid, pour order 4): -2444,-1364 -2210,-1364 -2210,-1280 -2444,-1280
GND on GND PLANE (split plane): -525.07,-1779.9 -3484.87,-1779.9 -3479.93,1529.9 -520.13,1529.9
V5P0 on POWER PLANE (split plane): -525.07,-1779.9 -3484.87,-1779.9 -3479.93,1529.9 -520.13,1529.9

## Other copper
Top Layer:
  rectangle net GND: -2519,-1400 -2418,-1370
  rectangle net GND: -2519,-1535 -2409,-1465
  rectangle net GND: -2519,-1535 -2465,-1367
  rectangle net V5P0: -2570,-1535 -2538,-1406

## Silkscreen, mask and mechanical layers (free items; w line width, h text height)
Top Overlay:
  rectangle: -1950,-1750 -1200,-1600
  lines w4: -2646.5,-1750 -2526.5,-1750 -2526.5,-1705 -2646.5,-1705 -2646.5,-1750 ; -2145,-1750 -2025,-1750 -2025,-1705 -2145,-1705 -2145,-1750
  text "AP1220_MACHXO2_A0" at -1950,-1530 h30
  text "A. Hood - FLIR EOC 2013" at -1950,-1580 h30
  text "5.0V" at -2631.5,-1740 h25
  text "2.5V" at -2130,-1740 h25